# EAGLE board untitled (EAGLE 6.4)
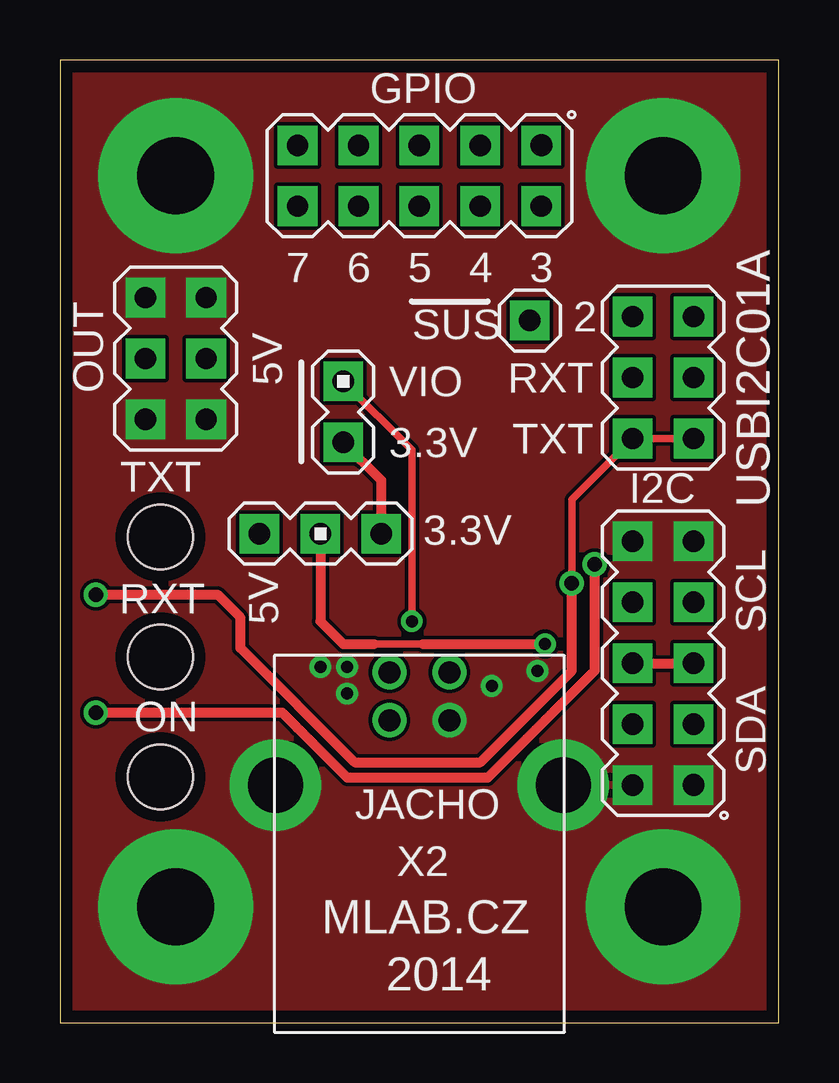
[diagram p0: board, top side]
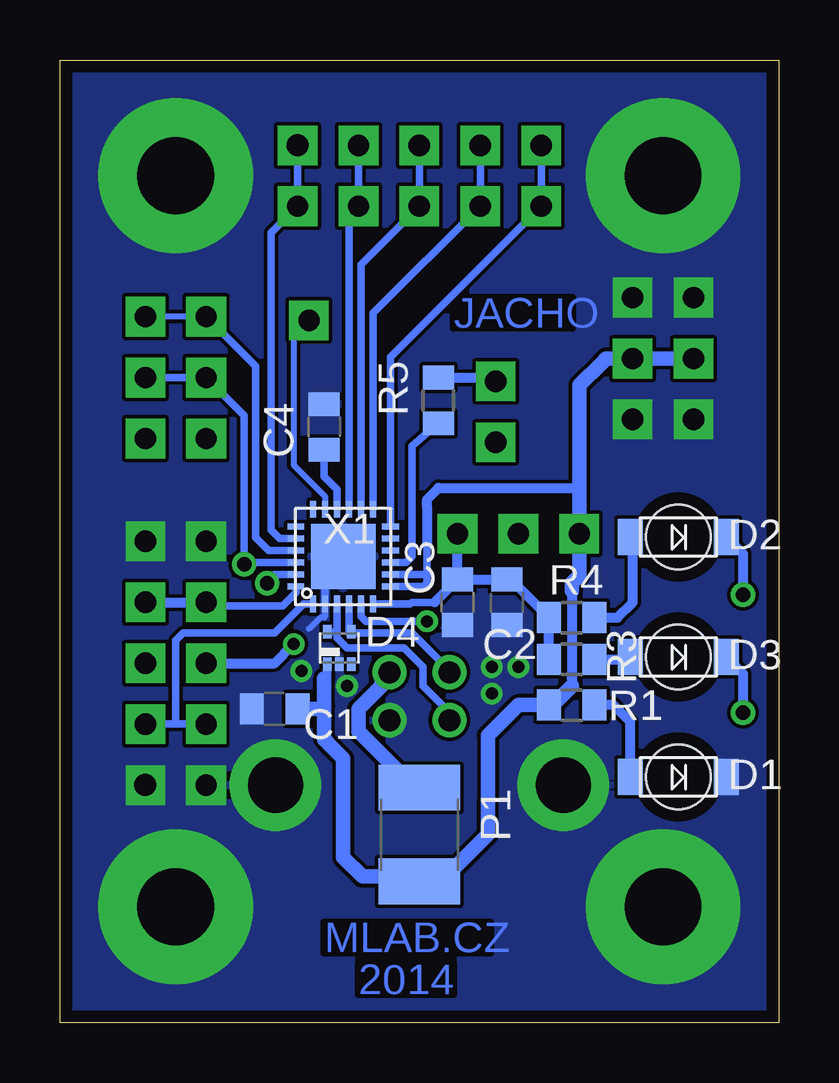
[diagram p1: board, bottom side, seen from below]

Size 29.97 x 40.13 mm. Coordinates in mm from the lower left corner, seen from the top.
Outline: 0,0 29.97,0 29.97,40.13 0,40.13 0,0
Copper layers (1*16): Top 0.035mm / dielectric 1.5mm / Bottom 0.035mm
Design rules "jacho": minimum track width 8mil, minimum drill 16mil, track to track 6mil, track to pad 6mil, pad to pad 6mil, via to via 6mil, smd to smd 6mil, copper to edge 20mil, drill to drill 8mil, minimum pad ring 10mil, minimum via ring 8mil, stop-mask expansion 4mil, vias tented up to drill 25mil, thermal gap 0mil

## Footprints (pad centres in the part's own frame; a part is rotated, then mirrored left to right if it is on the bottom)
C0805 = smd 0.991 x 1.295: 1 -0.95,0; 2 0.95,0
1206_2 = smd 1.5 x 1.05: A 0,-2; K 0,2 | hole 2.7: 0,0
SOT553 = smd 0.35 x 0.55: 1 -0.5,-0.675; 2 0,-0.675; 3 0.5,-0.675; 4 0.5,0.675; 5 -0.5,0.675
1812 = smd 1.9 x 3.4: 1 -1.95,0; 2 1.95,0
0805 = smd 0.991 x 1.295: 1 -0.95,0; 2 0.95,0
MA02-1 = drill 0.889 pad 1.651 square: 1 -1.27,0; 2 1.27,0
MA05-2 = drill 0.914 pad 1.651 square: 1 -5.08,-1.27 | drill 0.889 pad 1.651 square: 2 -5.08,1.27; 3 -2.54,-1.27; 4 -2.54,1.27; 5 0,-1.27; 6 0,1.27; 7 2.54,-1.27; 8 2.54,1.27; 9 5.08,-1.27; 10 5.08,1.27
MA03-1 = drill 0.889 pad 1.651 square: 1 -2.54,0; 2 0,0; 3 2.54,0
MA03-2 = drill 0.889 pad 1.651 square: 1 -2.54,-1.27; 2 -2.54,1.27; 3 0,-1.27; 4 0,1.27; 5 2.54,-1.27; 6 2.54,1.27
MA01-1 = drill 0.889 pad 1.651 square: 1 0,0
QFN-24 = smd 0.7 x 0.25: P$1 -1.975,1.25; P$2 -1.975,0.75; P$3 -1.975,0.25; P$4 -1.975,-0.25; P$5 -1.975,-0.75; P$6 -1.975,-1.25; P$13 1.975,-1.25; P$14 1.975,-0.75; P$15 1.975,-0.25; P$16 1.975,0.25; P$17 1.975,0.75; P$18 1.975,1.25 | smd 0.25 x 0.7: P$7 -1.25,-1.975; P$8 -0.75,-1.975; P$9 -0.25,-1.975; P$10 0.25,-1.975; P$11 0.75,-1.975; P$12 1.25,-1.975; P$19 1.25,1.975; P$20 0.75,1.975; P$21 0.25,1.975; P$22 -0.25,1.975; P$23 -0.75,1.975; P$24 -1.25,1.975 | smd 2.7 x 2.7: P$25 0,0
USB_B = drill 0.92 pad 1.422: 1 1.25,4.7; 2 -1.25,4.7; 3 -1.25,2.7; 4 1.25,2.7 | drill 2.3 pad 3.81: GND -6,0; GND2 6,0
SROUB3M = drill 3.2 pad 6.452: P$1 0,0

## Placement (x,y rotation side)
C1  1uF  [C0805]  21.02,13.08 180 bottom
C2  10uF  [C0805]  11.33,17.53 270 bottom
C3  100nF  [C0805]  13.4,17.53 270 bottom
C4  4u7  [C0805]  18.95,24.83 90 bottom
D1  ZELENA  [1206_2]  4.19,10.25 270 bottom
D2  CERVENA  [1206_2]  4.19,20.25 270 bottom
D3  CERVENA  [1206_2]  4.19,15.25 270 bottom
D4  SP1001-04XTG  [SOT553]  18.32,15.62 0 bottom
P1  750mA  [1812]  14.99,7.84 270 bottom
R1  470R  [0805]  8.64,13.24 180 bottom
R3  470R  [0805]  8.64,15.14 0 bottom
R4  470R  [0805]  8.64,16.89 0 bottom
R5  4k7  [0805]  14.19,25.94 90 bottom
SV1  MA02-1  [MA02-1]  11.81,25.46 90 top
SV2  [MA05-2]  25.15,14.99 90 top
SV3  [MA03-1]  10.86,20.38 180 top
SV4  [MA03-2]  25.15,26.89 90 top
SV5  [MA05-2]  14.99,35.31 180 top
SV6  [MA03-2]  4.83,27.69 90 top
SV7  [MA01-1]  19.59,29.27 0 top
X1  CP2112  [QFN-24]  18.16,19.43 90 bottom
X2  [USB_B]  14.99,9.91 0 top
X3  SROUB3M  [SROUB3M]  4.83,4.83 0 top
X4  SROUB3M  [SROUB3M]  4.83,35.31 0 top
X5  SROUB3M  [SROUB3M]  25.15,4.83 0 top
X6  SROUB3M  [SROUB3M]  25.15,35.31 0 top

## Library data of the parts
C1-C4 = moje_C
D1-D4 = moje_diody
P1 X3-X6 = moje
R1 R3-R5 = moje_R
SV1 SV7 = moje_hrebinky
SV2-SV6 = moje_hrebinky; OC_FARNELL: unknown; OC_NEWARK: unknown
X1 = moje_io
X2 = moje_konektory

## Nets
0: D2.K SV4.1 SV4.2 X1.P$23
1: D3.K SV4.3 SV4.4 X1.P$22
2: SV4.5 SV4.6 X1.P$21
3: SV5.1 SV5.2 X1.P$20
4: SV5.3 SV5.4 X1.P$15
5: SV5.5 SV5.6 X1.P$14
6: SV5.7 SV5.8 X1.P$13
7: SV5.9 SV5.10 X1.P$12
+3.3V: C2.1 C3.1 R3.1 R4.1 SV1.1 SV3.1 X1.P$6
+5V: C1.1 D4.1 P1.2 R1.2 SV3.3 SV6.3 SV6.4 X1.P$7 X1.P$8
GND: C1.2 C2.2 C3.2 C4.2 D1.K D4.2 SV2.1 SV2.2 SV2.9 SV2.10 SV6.1 SV6.2 SV6.5 SV6.6 X1.P$2 X1.P$25 X2.4 X2.GND X2.GND2 X3.P$1 X4.P$1 X5.P$1 X6.P$1
N$1: D4.5 X1.P$3 X2.3
N$2: D4.4 X1.P$4 X2.2
N$3: C4.1 X1.P$16
N$4: SV7.1 X1.P$17
N$5: P1.1 X2.1
N$6: D1.A R1.1
N$7: R5.2 SV1.2 X1.P$5
N$10: D3.A R3.2
N$12: SV2.5 SV2.6 SV3.2
N$13: D2.A R4.2
N$15: R5.1 X1.P$9
SCL: SV2.7 SV2.8 X1.P$24
SDA: SV2.3 SV2.4 X1.P$1

## Tracks (layer width: path | path; a pad name or v marks a point on that pad's centre or on a via)
0  (via drill 0.6)
  Top 0.305: v21.34,18.32 21.34,21.81 SV4.2 SV4.1
  Top 0.406: v1.49,17.84 6.57,17.84 7.53,16.89 7.53,15.62 12.29,10.86 17.53,10.86 21.34,14.67 v21.34,18.32
  Bottom 0.305: X1.P$23 20.97,18.68 21.02,18.64
  Bottom 0.406: v21.34,18.32 21.02,18.64 | v1.49,17.84 1.49,19.55 D2.K
1  (via drill 0.6)
  Top 0.406: v22.29,19.11 22.29,14.67 21.97,14.35 17.84,10.22 11.97,10.22 9.91,12.29 9.27,12.92 v1.49,12.92
  Bottom 0.305: X1.P$22 22.38,19.18 v22.29,19.11 22.29,25.3 SV4.4 SV4.3
  Bottom 0.406: v1.49,12.92 1.49,14.55 D3.K
2
  Bottom 0.254: SV4.6 SV4.5
  Bottom 0.305: X1.P$21 21.27,19.68 21.81,20.22 21.81,27.37 SV4.6
3
  Bottom 0.305: 20.86,33.24 20.46,33.64 | 20.46,33.64 SV5.2 SV5.1 | 20.46,33.64 21.18,32.93 21.18,20.54 20.82,20.18 20.5,20.18 X1.P$20
4
  Bottom 0.305: X1.P$15 17.91,33.65 SV5.4 SV5.3
5
  Bottom 0.305: X1.P$14 17.41,31.61 SV5.6 SV5.5
6
  Bottom 0.305: X1.P$13 16.91,29.57 SV5.8 SV5.7
7
  Bottom 0.305: X1.P$12 16.19,27.76 SV5.10 SV5.9
+3.3V
  Top 0.406: SV3.1 13.4,22.61 SV1.1
  Bottom 0.305: 14.35,17.53 15.3,17.53 15.37,17.46 X1.P$6
  Bottom 0.406: C3.1 C2.1 11.17,18.48 R4.1 R3.1 | C3.1 SV3.1 | C3.1 14.19,17.68 14.35,17.53
+5V
  Bottom 0.305: D4.1 18.82,14.38 18.95,14.35 | X1.P$7 15.12,18.18 14.81,18.18 14.67,18.32 14.67,18.8 | 14.67,18.8 14.67,19.91 | X1.P$8 14.78,18.68 14.67,18.8
  Bottom 0.406: 18.82,11.68 18.8,11.65 | 14.67,19.91 14.67,21.49 14.67,21.81 14.19,22.29 8.48,22.29 8.32,22.45 | 8.64,18 8.64,14.35 8.64,14.03
  Bottom 0.61: 18.8,11.65 18.16,11.02 18.16,6.89 17.37,6.1 15.19,6.1 | 15.19,6.1 P1.2 | 15.19,6.1 13.88,6.1 12.13,7.84 12.13,9.23 12.13,11.97 10.86,13.24 R1.2 9.43,13.24 8.64,14.03 | 18.82,11.68 18.95,11.81 18.95,13.24 | 18.95,13.24 18.95,14.35 | SV6.4 SV6.3 7.21,27.69 7.37,27.53 8.32,26.57 8.32,22.45 8.32,22.29 SV3.3 8.32,18.64 8.64,18.32 8.64,18 | C1.1 19.11,13.08 18.95,13.24
GND  (via drill 0.5)
  Bottom 0.254: X1.P$2 18.91,16.93 18.95,16.89 19.11,16.89 19.59,16.41
  Bottom 0.305: X1.P$2 18.91,18.68 X1.P$25
  other vias: 10.86,14.83 11.97,14.83 11.97,13.72 18,14.03 19.91,14.67
  pour Bottom: -0.73,41.5 31.02,41.5 30.86,-0.89 -0.89,-0.89
  pour Top: 0.06,40.39 30.23,40.39 30.07,0.06 -0.1,0.06
N$1
  Bottom 0.305: X2.3 13.74,12.94 14.83,14.03 14.83,14.83 15.62,15.62 18,15.62 18.41,16.03 18.41,16.26 | X1.P$3 18.41,16.41 18.41,16.26 | D4.5 18.45,16.3 18.41,16.26
N$2
  Bottom 0.305: X2.2 13.74,14.69 15.3,16.26 17.62,16.26 D4.4 17.91,16.23 17.91,16.55 X1.P$4
N$3
  Bottom 0.305: X1.P$16 18.41,22.22 18.95,22.76 C4.1
N$4
  Bottom 0.254: SV7.1 20.22,28.48 20.22,23.24 18.95,21.97 18.91,21.93 X1.P$17
N$5
  Bottom 0.61: P1.1 15.1,9.91 15.78,9.91 15.78,10.38 17.37,11.97 17.53,12.13 17.53,13.08 16.57,14.03 16.57,14.27 X2.1
N$6
  Bottom 0.406: D1.A 6.19,12.54 6.89,13.24 R1.1
N$7  (via drill 0.5)
  Top 0.305: v14.67,16.73 14.67,23.88 SV1.2
  Bottom 0.305: X1.P$5 17.41,16.93 17.21,16.73 v14.67,16.73
  Bottom 0.406: R5.2 11.97,26.89 SV1.2
N$10
  Bottom 0.406: R3.2 6.29,15.14 D3.A
N$12  (via drill 0.5)
  Top 0.305: 13.08,15.78 15.14,15.78
  Top 0.406: SV3.2 10.86,16.73 11.65,15.94 11.81,15.78 13.08,15.78 | 15.14,15.78 v20.22,15.78 | SV2.6 SV2.5
  Bottom 0.406: SV2.6 21.02,14.99 v20.22,15.78
N$13
  Bottom 0.406: R4.2 6.73,16.89 6.1,17.53 6.1,20.15 D2.A
N$15
  Bottom 0.305: X1.P$9 15.55,19.18 15.3,19.43 15.3,24.03 R5.1
SCL
  Bottom 0.305: X1.P$24 20.14,17.93 20.7,17.37 23.72,17.37 SV2.8
  Bottom 0.406: SV2.7 SV2.8
SDA
  Bottom 0.305: SV2.3 25.15,12.45 | 25.15,12.45 SV2.4 | 25.15,12.45 25.15,15.94 24.83,16.26 21.02,16.26 19.82,17.46 X1.P$1

## Text on the board
Bottom: JACHO | MLAB.CZ | 2014
tPlace: GPIO | 7 | 6 | 5 | 4 | 3 | 2 | SUS | RXT | OUT | 5V | VIO | TXT | TXT | 3.3V | I2C | USBI2C01A | 3.3V | SCL | RXT | 5V | SDA | ON | JACHO | MLAB.CZ | 2014